# Altium PCB FOTA.PcbDoc
Units mm, origin at the board's own origin, x right, y up, seen from the top; angles counter-clockwise.
Board outline 102.11 x 62.23 mm, 2 copper layers (Top Layer, Bottom Layer); 27 components, 22 nets, 124 pads, 0 vias.
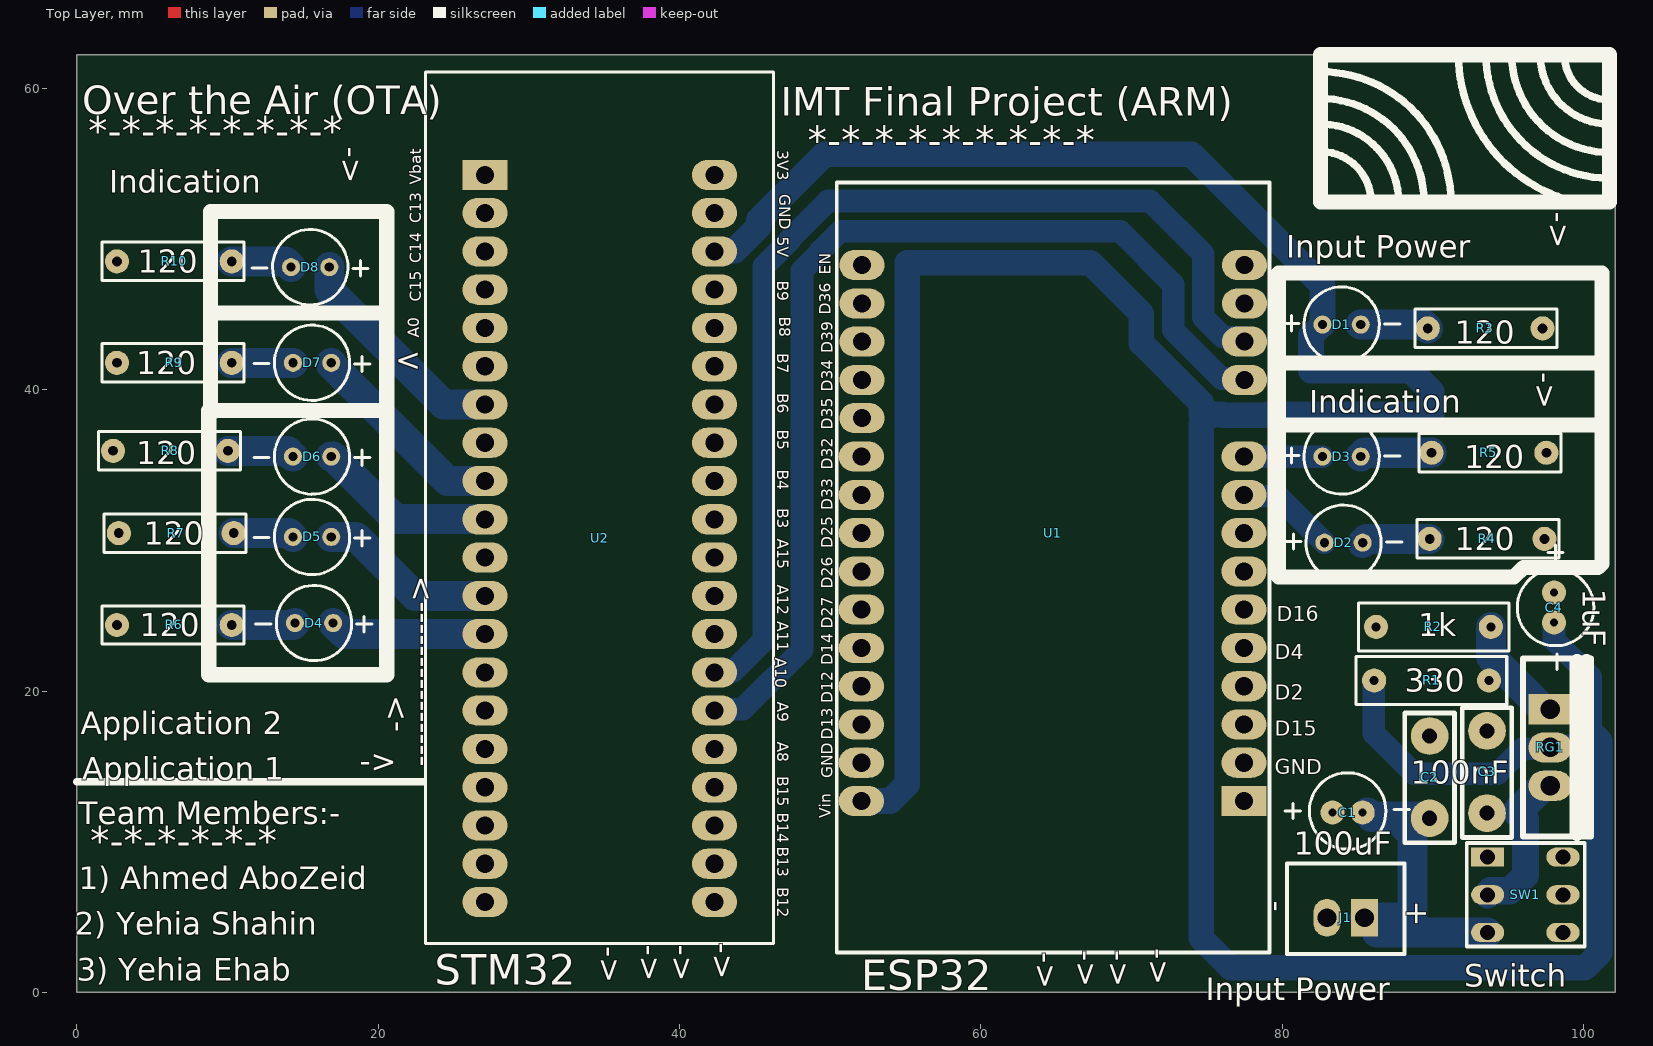
[diagram p0: Top Layer view]
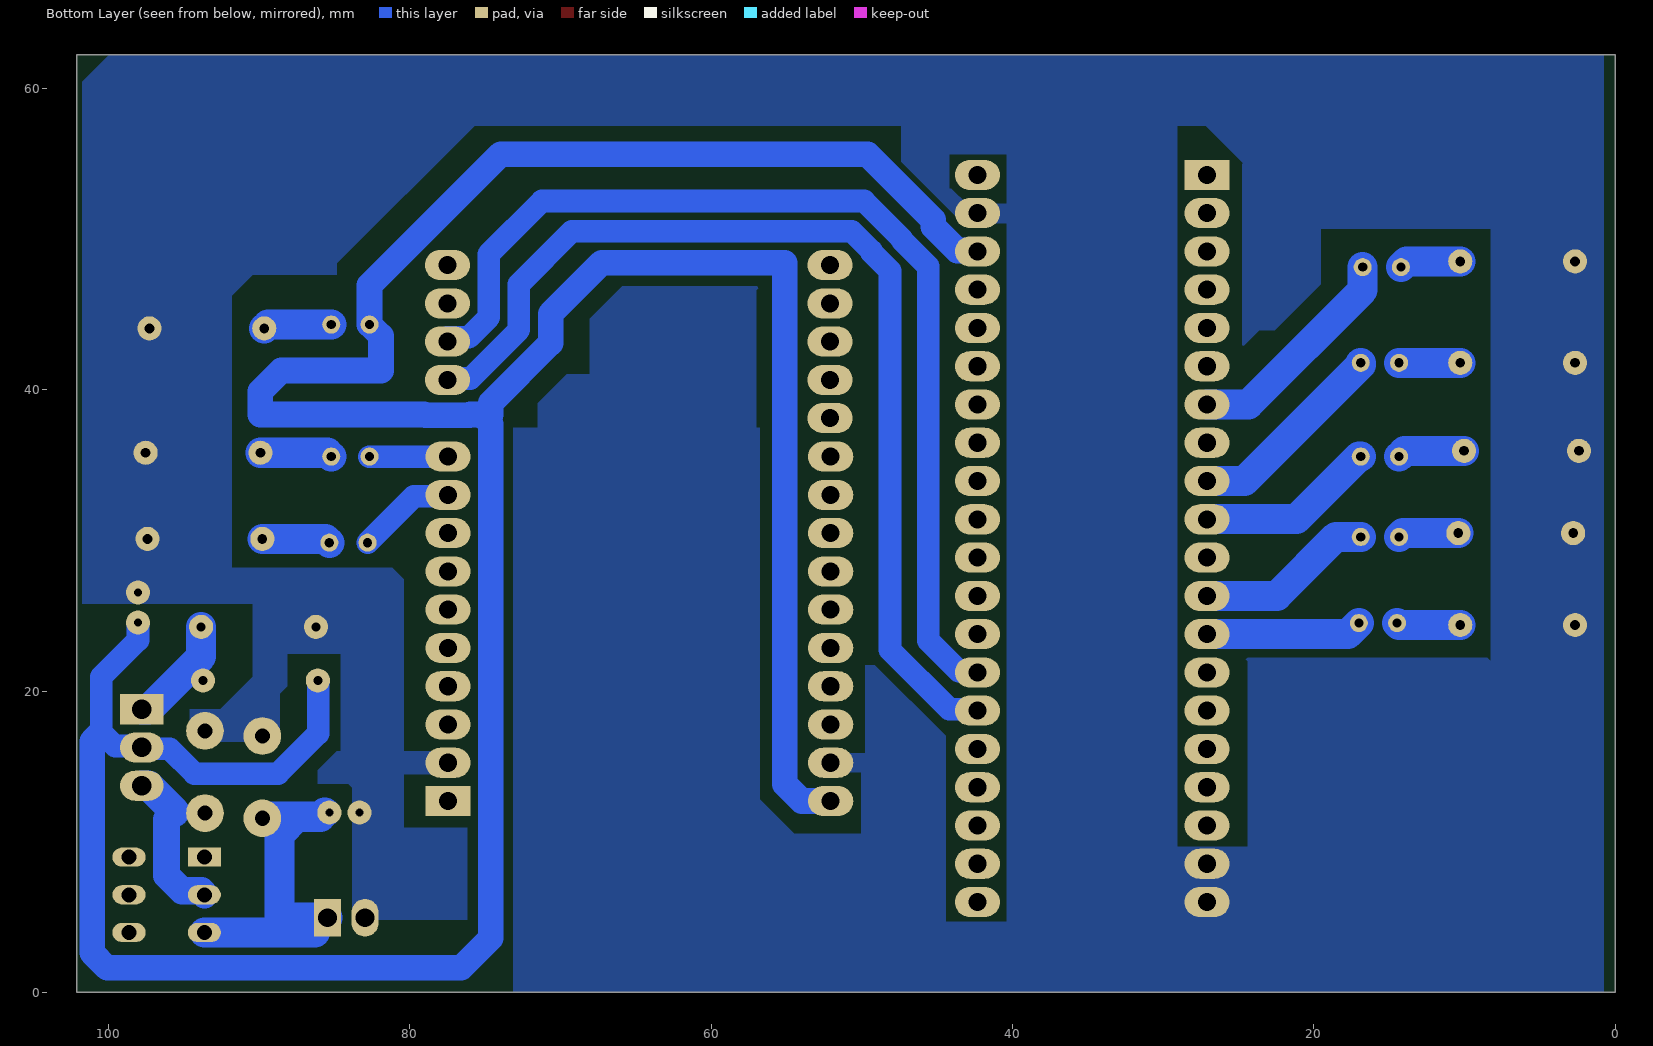
[diagram p1: Bottom Layer view, seen from below]

## Layer stack, top to bottom
Top Solder: solder mask 0.0102, Solder Resist, Dk 3.5
Top Layer: signal copper 0.0356
Dielectric 1: dielectric 0.32, FR-4, Dk 4.8
Bottom Layer: signal copper 0.0356
Bottom Solder: solder mask 0.0102, Solder Resist, Dk 3.5

## Board outline
0,0 102.108,0 102.108,62.23 0,62.23

## Design rules (kind name [scope] priority, off if disabled: settings)
Clearance [All] p1: gap=0.254 ignorepadtopadclearanceinfootprint=FALSE except(0: Arc-Hole Track-Hole SMDPad-Hole THPad-Hole Via-Hole Fill-Hole Poly-Hole Region-Hole Text-Hole; 0.5: Arc-Arc Arc-Track Arc-THPad Track-Track Track-THPad)
PolygonConnect PolygonConnect_9 [All vs IsNamedPolygon('Bottom Layer-GND 3')] p1: thpad.connectstyle=Direct thpad.reliefconductorwidth=0.254 thpad.reliefentries=4 thpad.polygonreliefangle="90 Angle" thpad.airgapwidth=0.254 smdpad.connectstyle=Relief smdpad.reliefconductorwidth=0.254 smdpad.reliefentries=4 smdpad.polygonreliefangle="90 Angle" smdpad.airgapwidth=0.254 via.connectstyle=Relief via.reliefconductorwidth=0.254 via.reliefentries=4 via.polygonreliefangle="90 Angle" via.airgapwidth=0.254
PolygonConnect PolygonConnect_8 [All vs IsNamedPolygon('Bottom Layer-GND 2')] p2: thpad.connectstyle=Direct thpad.reliefconductorwidth=0.254 thpad.reliefentries=4 thpad.polygonreliefangle="90 Angle" thpad.airgapwidth=0.254 smdpad.connectstyle=Relief smdpad.reliefconductorwidth=0.254 smdpad.reliefentries=4 smdpad.polygonreliefangle="90 Angle" smdpad.airgapwidth=0.254 via.connectstyle=Relief via.reliefconductorwidth=0.254 via.reliefentries=4 via.polygonreliefangle="90 Angle" via.airgapwidth=0.254
PolygonConnect PolygonConnect_7 [All vs IsNamedPolygon('Bottom Layer-GND 2')] p3: thpad.connectstyle=Direct thpad.reliefconductorwidth=0.254 thpad.reliefentries=4 thpad.polygonreliefangle="90 Angle" thpad.airgapwidth=0.254 smdpad.connectstyle=Relief smdpad.reliefconductorwidth=0.254 smdpad.reliefentries=4 smdpad.polygonreliefangle="90 Angle" smdpad.airgapwidth=0.254 via.connectstyle=Relief via.reliefconductorwidth=0.254 via.reliefentries=4 via.polygonreliefangle="90 Angle" via.airgapwidth=0.254
PolygonConnect PolygonConnect_6 [All vs IsNamedPolygon('Bottom Layer-GND 1')] p4: thpad.connectstyle=Direct thpad.reliefconductorwidth=0.254 thpad.reliefentries=4 thpad.polygonreliefangle="90 Angle" thpad.airgapwidth=0.254 smdpad.connectstyle=Relief smdpad.reliefconductorwidth=0.254 smdpad.reliefentries=4 smdpad.polygonreliefangle="90 Angle" smdpad.airgapwidth=0.254 via.connectstyle=Relief via.reliefconductorwidth=0.254 via.reliefentries=4 via.polygonreliefangle="90 Angle" via.airgapwidth=0.254
PolygonConnect PolygonConnect_5 [All vs IsNamedPolygon('Bottom Layer-GND 1')] p5: thpad.connectstyle=Direct thpad.reliefconductorwidth=0.254 thpad.reliefentries=4 thpad.polygonreliefangle="90 Angle" thpad.airgapwidth=0.254 smdpad.connectstyle=Relief smdpad.reliefconductorwidth=0.254 smdpad.reliefentries=4 smdpad.polygonreliefangle="90 Angle" smdpad.airgapwidth=0.254 via.connectstyle=Relief via.reliefconductorwidth=0.254 via.reliefentries=4 via.polygonreliefangle="90 Angle" via.airgapwidth=0.254
PolygonConnect PolygonConnect_4 [All vs IsNamedPolygon('Bottom Layer-GND 1')] p6: thpad.connectstyle=Direct thpad.reliefconductorwidth=0.254 thpad.reliefentries=4 thpad.polygonreliefangle="90 Angle" thpad.airgapwidth=0.254 smdpad.connectstyle=Relief smdpad.reliefconductorwidth=0.254 smdpad.reliefentries=4 smdpad.polygonreliefangle="90 Angle" smdpad.airgapwidth=0.254 via.connectstyle=Relief via.reliefconductorwidth=0.254 via.reliefentries=4 via.polygonreliefangle="90 Angle" via.airgapwidth=0.254
PolygonConnect PolygonConnect_3 [All vs IsNamedPolygon('Bottom Layer-GND 1')] p7: thpad.connectstyle=Direct thpad.reliefconductorwidth=0.254 thpad.reliefentries=4 thpad.polygonreliefangle="90 Angle" thpad.airgapwidth=0.254 smdpad.connectstyle=Relief smdpad.reliefconductorwidth=0.254 smdpad.reliefentries=4 smdpad.polygonreliefangle="90 Angle" smdpad.airgapwidth=0.254 via.connectstyle=Relief via.reliefconductorwidth=0.254 via.reliefentries=4 via.polygonreliefangle="90 Angle" via.airgapwidth=0.254
PolygonConnect PolygonConnect_2 [All vs IsNamedPolygon('Bottom Layer-GND')] p8: thpad.connectstyle=Direct thpad.reliefconductorwidth=0.254 thpad.reliefentries=4 thpad.polygonreliefangle="90 Angle" thpad.airgapwidth=0.254 smdpad.connectstyle=Relief smdpad.reliefconductorwidth=0.254 smdpad.reliefentries=4 smdpad.polygonreliefangle="90 Angle" smdpad.airgapwidth=0.254 via.connectstyle=Relief via.reliefconductorwidth=0.254 via.reliefentries=4 via.polygonreliefangle="90 Angle" via.airgapwidth=0.254
PolygonConnect PolygonConnect_1 [All vs IsNamedPolygon('Bottom Layer-GND')] p9: thpad.connectstyle=Direct thpad.reliefconductorwidth=0.254 thpad.reliefentries=4 thpad.polygonreliefangle="90 Angle" thpad.airgapwidth=0.254 smdpad.connectstyle=Relief smdpad.reliefconductorwidth=0.254 smdpad.reliefentries=4 smdpad.polygonreliefangle="90 Angle" smdpad.airgapwidth=0.254 via.connectstyle=Relief via.reliefconductorwidth=0.254 via.reliefentries=4 via.polygonreliefangle="90 Angle" via.airgapwidth=0.254
PolygonConnect [All] p10: connectstyle=Relief reliefconductorwidth=0.254 reliefentries=4 polygonreliefangle="90 Angle" airgapwidth=0.254
RoutingVias [All] p1: holewidth=0.711 width=1.27 viastyle="Through Hole" minholewidth=0.711 minwidth=1.27 maxholewidth=0.711 maxwidth=1.27
SolderMaskExpansion [All] p1: expansion=0.102
Width [All] p1: maxlimit=3 minlimit=0.5 preferedwidth=1 minimp=50.000000 maximp=50.000000 favimp=50.000000
30 further rules are at their usual default settings.

## Components (designator, comment, footprint, x,y, rotation, side; value= is the part's Value field where it differs from the comment)
C1 "100uF" CapacitorPOL 84.644,13.438 r180 top
C2 "100nF" "CAP non" 89.789,14.138 r90 top
C3 "100nF" "CAP non" 93.599,14.478 r90 top
C4 "1uF" CapacitorPOL 99.544,25.243 r90 top
D1 "LED" LED 82.677,44.323 r0 top
D2 "LED" LED 82.804,29.845 r0 top
D3 "LED" LED 82.677,35.56 r0 top
D4 "LED" LED 17.018,24.511 r180 top
D5 "LED" LED 16.891,30.226 r180 top
D6 "LED" LED 16.891,35.56 r180 top
D7 "LED" LED 16.891,41.783 r180 top
D8 "LED" LED 16.764,48.133 r180 top
J1 "Data Connector" "Data Connnector 2 pins" 79.221,4.953 r270 top
R1 "330" 330 83.006,19.701 r0 top
R2 "1k" R-1k 93.853,24.257 r180 top
R3 "120" R120 97.282,44.069 r180 top
R4 "120" R120 97.409,30.099 r180 top
R5 "120" R120 97.536,35.814 r180 top
R6 "120" R120 2.667,24.384 r0 top
R7 "120" R120 2.794,30.48 r0 top
R8 "120" R120 2.413,35.941 r0 top
R9 "120" R120 2.667,41.783 r0 top
R10 "120" R120 2.667,48.514 r0 top
RG1 "Adjustable Voltage Regulator" Regulator 97.79,18.796 r0 top
SW1 "On-Off Push Button" "DIP6 - SW" 96.139,6.477 r0 top
U1 "ESP32" ESP32 77.47,12.7 r180 top
U2 "STM32" DIP46 27.091,54.257 r0 top

## Footprints (in the part's own frame and the unit in brackets; to place one, negate y for a bottom-side part, rotate by r counter-clockwise, add the part's x,y. Pads: shape width x height; smd on the part's side, far side on the other; paste and mask are expansions set on the pad)
330 [mm]
  round 1.6 hole 0.6: 1(3.1,1) 2(10.72,1)
  silkscreen extent 1.9,-0.6 11.9,2.6, body extent 2.83,-0.14 11,2.14, height 2.44
"CAP non" [mm]
  round 2.5 hole 1: 1(-2.581,0) 2(2.88,0)
  silkscreen extent -4.2,-1.65 4.4,1.65, body extent -2.79,-1.3 3.21,1.3, height 5.2
CapacitorPOL [mm]
  round 1.6 hole 0.533: 1(-0.7,1.5) 2(1.3,1.5)
  silkscreen extent -3.8,-1.14 4.45,3.94, body extent -2.45,-1.25 3.05,4.25, height 12.5
"Data Connnector 2 pins" [mm]
  rect 2.5x1.8 hole 1.25: 1(0,6.25)
  oval 2.5x1.8 hole 1.25: 2(0,3.75)
  silkscreen extent -3.6,1.1 2.4,8.9, body extent -3.48,1.3 2.28,8.7, height 7.01
"DIP6 - SW" [mm]
  rect 2.2x1.27 hole 1: 1(-2.5,2.5)
  oval 2.2x1.27 hole 1: 2(-2.5,0) 3(-2.5,-2.5) 4(2.5,-2.5) 5(2.5,0) 6(2.5,2.5)
  silkscreen extent -3.89,-3.43 3.94,3.43, body extent -3.05,-2.84 2.95,3.16, height 10.2
DIP46 [mm]
  rect 3x2 hole 1.2: 1(0,0)
  oval 3x2 hole 1.2: 2(0,-2.54) 3(0,-5.08) 4(0,-7.62) 5(0,-10.16) 6(0,-12.7) 7(0,-15.24) 8(0,-17.78) 9(0,-20.32) 10(0,-22.86) 11(0,-25.4) 12(0,-27.94) 13(0,-30.48) 14(0,-33.02) 15(0,-35.56) 16(0,-38.1) 17(0,-40.64) 18(0,-43.18) 19(0,-45.72) 20(0,-48.26) 27(15.24,-48.26) 28(15.24,-45.72) 29(15.24,-43.18) 30(15.24,-40.64) 31(15.24,-38.1) 32(15.24,-35.56) 33(15.24,-33.02) 34(15.24,-30.48) 35(15.24,-27.94) 36(15.24,-25.4) 37(15.24,-22.86) 38(15.24,-20.32) 39(15.24,-17.78) 40(15.24,-15.24) 41(15.24,-12.7) 42(15.24,-10.16) 43(15.24,-7.62) 44(15.24,-5.08) 45(15.24,-2.54) 46(15.24,0)
  silkscreen extent -3.96,-51.02 19.15,6.84, body extent -3.92,-51 19.08,6.8, height 11.51
ESP32 [mm]
  rect 3x2 hole 1.2: 1(0,0)
  oval 3x2 hole 1.2: 2(0,-2.54) 3(0,-5.08) 4(0,-7.62) 5(0,-10.16) 6(0,-12.7) 7(0,-15.24) 8(0,-17.78) 9(0,-20.32) 10(0,-22.86) 12(-0.04,-27.95) 13(-0.04,-30.49) 14(-0.04,-33.03) 15(-0.04,-35.57) 16(25.36,-35.57) 17(25.36,-33.03) 18(25.36,-30.49) 19(25.36,-27.95) 20(25.36,-25.41) 21(25.4,-22.86) 22(25.4,-20.32) 23(25.4,-17.78) 24(25.4,-15.24) 25(25.4,-12.7) 26(25.4,-10.16) 27(25.4,-7.62) 28(25.4,-5.08) 29(25.4,-2.54) 30(25.4,0)
  silkscreen extent -1.7,-41.05 27.03,10.06, body extent -1.58,-40.97 26.92,9.96, height 15.2
LED [mm]
  round 1.2 hole 0.61: 1(0,0) 2(2.54,0)
  silkscreen extent -2.58,-2.5 5.14,2.5, body extent -0.65,-1.9 2.78,1.9, height 5.21
R120 [mm]
  round 1.6 hole 0.65: 1(0,0) 2(7.62,0)
  silkscreen extent -0.97,-1.28 8.45,1.28, body extent -0.27,-1.14 7.89,1.14, height 2.44
R-1k [mm]
  round 1.6 hole 0.6: 1(0,0) 2(7.62,0)
  silkscreen extent -1.2,-1.6 8.8,1.6, body extent -0.18,-1.19 7.98,1.1, height 2.44
Regulator [mm]
  rect 2.9x2 hole 1.3: 1(0,0)
  oval 2.9x2 hole 1.3: 2(0,-2.54) 3(0,-5.08)
  silkscreen extent -1.8,-8.44 2.7,3.36, body extent -1.75,-8.48 2.65,3.4, height 20.11

## Part data
C1: library part "CAP 100u", "Cap Aluminum 100uF 25V 20% (10 X 12mm) Radial Aluminum Cylindrical Can 5mm 250mA 1000 hr 150°C Bulk", Case/Package=Radial, Manufacturer 1="Vishay BCcomponents", Manufacturer Part Number 1=MAL216056101E3, Max Operating Temperature=150°C, Min Operating Temperature=-55°C, Package Quantity=1000, Ripple Current=175mA, Supplier Part Number 1=4837PHBK-ND, Tolerance=20%, Voltage Rating=25V, Capacitance=100uF, Category=Capacitors, ComponentLink1Description=http://www.farnell.com/datasheets/2057608.pdf?src-supplier=Element14, ComponentLink1URL=http://www.farnell.com/datasheets/2057608.pdf?src-supplier=Element14, ComponentLink2Description=http://www.vishay.com/docs/49448/_alu_caps_smd_radial_axial_vmn-sg2185-1512.pdf?src-supplier=Digi-Key, ComponentLink2URL=http://www.vishay.com/docs/49448/_alu_caps_smd_radial_axial_vmn-sg2185-1512.pdf?src-supplier=Digi-Key, Diameter=10mm, Height=12mm, Height - Seated (Max)=0.531inch, Impedance=120mR, Lead Pitch=0.197inch, Life (Hours)=1000Hour, Mount="Through Hole", Packaging=Bulk, Polarity=Polar, Pricing 1="1=1.67000, 10=1.31800, 50=1.14220, 100=0.98840, 500=0.74680, 1000=0.65895, 2500=0.61502, 5000=0.59306 (USD)", REACH SVHC=Unknown, RoHS=Yes, RoHS Compliant=Yes, Stock 1=2988, Supplier 1=Digi-Key, Voltage Rating (DC)=25V
C2 C3: library part "Non polarized capacitor", "Generial Non polarized capacitor for through hole or SMD capacitors"
C4: library part "CAP 10u", "10uF 35 V dc Aluminium Electrolytic Capacitor; BX Series 1000h 10(Dia.)x12.5mm", Capacitance=10uF, Case/Package=Radial, Leakage Current=4uA, Manufacturer 1=Nichicon, Manufacturer Part Number 1=UBX1V100MPL, Max Operating Temperature=150°C, Min Operating Temperature=-55°C, Package Quantity=200, Ripple Current=175mA, Supplier Part Number 1=493-14906-ND, Tolerance=20%, Voltage=35V, Category=Capacitor, ComponentLink1Description=https://datasheet.ciiva.com/11778/0900766b80ec9534-11778134.pdf?src-supplier=RSComponents, ComponentLink1URL=https://datasheet.ciiva.com/11778/0900766b80ec9534-11778134.pdf?src-supplier=RSComponents, ComponentLink2Description=https://datasheet.ciiva.com/41750/444350-da-01-en-radial-elko-bx-10uf-35-v-41750976.pdf?src-supplier=Conrad, ComponentLink2URL=https://datasheet.ciiva.com/41750/444350-da-01-en-radial-elko-bx-10uf-35-v-41750976.pdf?src-supplier=Conrad, ComponentLink3Description=https://datasheet.ciiva.com/115/e-bx-115042.pdf?src-supplier=Digi-Key, ComponentLink3URL=https://datasheet.ciiva.com/115/e-bx-115042.pdf?src-supplier=Digi-Key, Construction=RADIAL, Diameter=10mm, Dissipation Factor=0.12%, Height=12.5mm, Height - Seated (Max)=0.551inch, Lead Diameter=0.6mm, Lead Pitch=5mm, Length=12.5mm, Life (Hours)=1000Hour, Mount="Through Hole", Packaging=Bulk, Pricing 1="1=1.40000, 10=1.10300, 50=0.95620, 100=0.82750, 500=0.62520, 1000=0.55166, 2500=0.51488, 5000=0.49649 (USD)", Radiation Hardening=No, RoHS=Yes, RoHS Compliant=Yes, Series=UBX, Stock 1=5, Supplier 1=Digi-Key, Termination=Radial, Voltage Rating=35V, Voltage Rating (DC)=35V
D1 D2 D3 D4 D5 D6 D7 D8: "Led, Red, T-1 (3Mm), 630 Nm, 1.8 V, 30 Ma, 20 Mcd Rohs Compliant: Yes", Case/Package=Radial, Color=Red, Forward Current=30mA, Forward Voltage=2.2V, Manufacturer 1="Wurth Electronics", Manufacturer Part Number 1=151031SS06000, Max Operating Temperature=85°C, Min Operating Temperature=-40°C, Package Quantity=1, Supplier Part Number 1=732-5006-ND, Test Current=20mA, Category=Optoelectronics, ComponentLink1Description=https://datasheet.ciiva.com/22657/151031ss06000-22657010.pdf?src-supplier=Element14, ComponentLink1URL=https://datasheet.ciiva.com/22657/151031ss06000-22657010.pdf?src-supplier=Element14, ComponentLink2Description=https://datasheet.ciiva.com/29335/759483-da-01-en-tht-led-3mm-superrot-151031ss06000-29335440.pdf?src-supplier=Conrad, ComponentLink2URL=https://datasheet.ciiva.com/29335/759483-da-01-en-tht-led-3mm-superrot-151031ss06000-29335440.pdf?src-supplier=Conrad, ComponentLink3Description=https://datasheet.ciiva.com/29562/151031ss06000-29562907.pdf?src-supplier=Digi-Key, ComponentLink3URL=https://datasheet.ciiva.com/29562/151031ss06000-29562907.pdf?src-supplier=Digi-Key, Dominant Wavelength=640nm, Height=5.55mm, Lens Size=3mm, Lens Style=Diffused,Circular,Round, Luminous Intensity=35mcd, Mount="Through Hole", Packaging=Bulk, Pricing 1="1=0.18000, 50=0.16700, 100=0.14300, 500=0.12300 (USD)", REACH SVHC=Unknown, RoHS=Yes, RoHS Compliant=Yes, Stock 1=4849, Supplier 1=Digi-Key, Viewing Angle=60°, Wavelength=630nm
J1: library part "Data Connector 2 pins"
R1: library part R330, "General Type Carbon Film Resistor 330Ohm 1/4W 5% Axial Bulk", Case/Package=Axial, Manufacturer 1=Yageo, Manufacturer Part Number 1=CFR-25JB-52-330R, Max Operating Temperature=155°C, Max Power Dissipation=250mW, Min Operating Temperature=-55°C, Package Quantity=200, Resistance=330R, Resistor Type="Carbon Film", Supplier Part Number 1=330QBK-ND, Temperature Coefficient=500ppm/°C, Tolerance=5%, Category=Resistors, ComponentLink1Description=http://www.yageo.com/NewPortal/yageodocoutput?fileName=/pdf/throughhole/Yageo_LR_CFR_2013.pdf&src-supplier=Digi-Key, ComponentLink1URL=http://www.yageo.com/NewPortal/yageodocoutput?fileName=/pdf/throughhole/Yageo_LR_CFR_2013.pdf&src-supplier=Digi-Key, Length=0.248inch, Number of Terminations=2, Packaging=Bulk, Pricing 1="1=0.10000, 10=0.06800, 25=0.04680, 50=0.03640, 100=0.02600, 250=0.02028, 500=0.01612, 1000=0.01144, 5000=0.00884 (USD)", RoHS=Yes, RoHS Compliant=Yes, Series="Carbon Film", Stock 1=34290, Supplier 1=Digi-Key
R2: library part "R 1k", "Res Carbon Film 1K Ohm 5% 1/4W -400ppm/°C to 0ppm/°C Conformal AXL Thru-Hole T/R", Case/Package=Conformal, Manufacturer 1="Stackpole Electronics", Manufacturer Part Number 1=CF14JT1K00, Max Operating Temperature=155°C, Max Power Dissipation=250mW, Min Operating Temperature=-55°C, Package Quantity=1, Resistance=1kR, Resistor Type="Carbon Film", Temperature Coefficient=-400ppm/°C, Tolerance=5%, Category=Resistors, ComponentLink1Description=http://components.arrow.com/part/dataview/27620077S9848643N1174?src-supplier=Arrow+Electronics, ComponentLink1URL=http://components.arrow.com/part/dataview/27620077S9848643N1174?src-supplier=Arrow+Electronics, ComponentLink2Description=http://www.seielect.com/Catalog/SEI-CF_CFM.pdf?src-supplier=Future+Electronics, ComponentLink2URL=http://www.seielect.com/Catalog/SEI-CF_CFM.pdf?src-supplier=Future+Electronics, ComponentLink3Description=https://www.seielect.com/catalog/SEI-CF_CFM.pdf?src-supplier=Avnet, ComponentLink3URL=https://www.seielect.com/catalog/SEI-CF_CFM.pdf?src-supplier=Avnet, ComponentLink4Description=https://www.seielect.com/catalog/SEI-Packaging.pdf?src-supplier=Digi-Key, ComponentLink4URL=https://www.seielect.com/catalog/SEI-Packaging.pdf?src-supplier=Digi-Key, ComponentLink5Description=https://www.seielect.com/Catalog/SEI-CF_CFM.pdf?src-supplier=Digi-Key, ComponentLink5URL=https://www.seielect.com/Catalog/SEI-CF_CFM.pdf?src-supplier=Digi-Key, ComponentLink6Description=https://www.verical.com/server-webapp/html/getDatasheet?partID=360403&src-supplier=Verical, ComponentLink6URL=https://www.verical.com/server-webapp/html/getDatasheet?partID=360403&src-supplier=Verical, Construction=Cylindrical, Contact Plating=Tin,Matte, Diameter=2.3mm, Features="Flame Retardant Coating", Lead Free="Lead Free", Length=6.5mm, Military Standard=Not, Mount="Through Hole,Axial", Number of Terminations=2, Packaging="Tape and Reel", Power Rating=250mW, Pricing 1="5000=0.00710, 10000=0.00690, 20000=0.00610 (USD)", Radiation Hardening=No, RoHS=Yes, RoHS Compliant=Yes, Series=CF, Stock 1=285000, Supplier 1="Arrow Electronics", Supplier Part Number 1=CF14JT1K00, Termination=Axial
R3 R4 R5 R6 R7 R8 R9 R10: library part R120, "General Type Carbon Film Resistor 120Ohm 1/4W 5% Axial Bulk", Case/Package=Axial, Manufacturer 1=Yageo, Manufacturer Part Number 1=CFR-25JB-52-120R, Max Operating Temperature=155°C, Max Power Dissipation=250mW, Min Operating Temperature=-55°C, Package Quantity=200, Resistance=120R, Resistor Type="Carbon Film", Supplier Part Number 1=9005903, Temperature Coefficient=500ppm/°C, Tolerance=5%, ComponentLink1Description=http://www.yageo.com/documents/recent/General%20Type_CFR.pdf?src-supplier=Future+Electronics, ComponentLink1URL=http://www.yageo.com/documents/recent/General%20Type_CFR.pdf?src-supplier=Future+Electronics, ComponentLink2Description=http://www.yageo.com/NewPortal/yageodocoutput?fileName=/pdf/throughhole/Yageo_LR_CFR_2013.pdf&src-supplier=Digi-Key, ComponentLink2URL=http://www.yageo.com/NewPortal/yageodocoutput?fileName=/pdf/throughhole/Yageo_LR_CFR_2013.pdf&src-supplier=Digi-Key, Lead Free="Lead Free", Length=0.248inch, Number of Terminations=2, Packaging=Bulk, Power Rating=250mW, Pricing 1="10000=0.00860, 30000=0.00580, 50000=0.00570, 100000=0.00550, 200000=0.00540 (USD)", RoHS=Yes, RoHS Compliant=Yes, Series="Carbon Film", Stock 1=7000, Supplier 1="Future Electronics"
RG1: library part LM350
U2: library part stm32f103c8t6, "STM32 Nucleo-32 development board with STM32F031K6 MCU, supports Arduino connectivity", Manufacturer 1=STMicroelectronics, Manufacturer Part Number 1=NUCLEO-F031K6, Package Quantity=1, Category="Development Boards, Kits, Programmers", ComponentLink1Description=http://www.farnell.com/datasheets/1966773.pdf?src-supplier=Farnell, ComponentLink1URL=http://www.farnell.com/datasheets/1966773.pdf?src-supplier=Farnell, ComponentLink2Description=http://www.farnell.com/datasheets/1966773.pdf?src-supplier=Element14, ComponentLink2URL=http://www.farnell.com/datasheets/1966773.pdf?src-supplier=Element14, ComponentLink3Description=http://www.st.com/st-web-ui/static/active/en/resource/technical/document/user_manual/DM00119724.pdf?s_searchtype=keyword&src-supplier=Avnet, ComponentLink3URL=http://www.st.com/st-web-ui/static/active/en/resource/technical/document/user_manual/DM00119724.pdf?s_searchtype=keyword&src-supplier=Avnet, ComponentLink4Description=http://www.st.com/content/ccc/resource/technical/document/datasheet/4d/c2/7e/10/77/4f/4a/60/DM00104043.pdf/files/DM00104043.pdf/jcr:content/translations/en.DM00104043.pdf?src-supplier=Digi-Key, ComponentLink4URL=http://www.st.com/content/ccc/resource/technical/document/datasheet/4d/c2/7e/10/77/4f/4a/60/DM00104043.pdf/files/DM00104043.pdf/jcr:content/translations/en.DM00104043.pdf?src-supplier=Digi-Key, Core Architecture=ARM, Evaluation Kit=Yes, Lead Free="Lead Free", Number of Bits=32, Pricing 1="61=15.28100, 70=14.45500, 130=13.62900, 310=12.80300, 610=11.97700, 3100=11.15100, 6100=10.32500 (USD)", REACH SVHC="No SVHC", RoHS=Yes, Stock 1=0, Supplier 1=Avnet, Supplier Part Number 1=NUCLEO-F031K6

## Nets (pads, with @x,y where several pads share a name; then routed paths per layer and width w, separated by ;. In a path a pad name is that pad's centre, name@x,y a point inside that pad or via, vN(x,y) a via of type N, cw(c..) or ccw(c..) an arc to the next point about the centre after c; other vN are vias at no path point)
5V: C4.1 D1.1 R1.1 RG1.2 U1.30 U2.44 | length 247
  Bottom Layer w1.5: R1.1 86.087,20.682 86.087,17.185 88.753,14.518 94.295,14.518 95.937,16.16 97.694,16.16 RG1.2 97.886,16.352 99.563,16.352 100.49,17.278 100.49,20.932 98.044,23.378 C4.1@98.044,24.493
  Bottom Layer w1.7: U2.44@42.291,49.13 U2.44@42.341,49.18 ; U2.44 42.388,49.234 43.672,49.234 45.26,50.823 45.26,51.265 49.621,55.626 73.977,55.626 82.677,46.926 D1.1 81.915,43.561 81.915,41.275 88.539,41.275 89.916,39.898 89.916,38.354 79.037,38.354 78.983,38.3 76.037,38.3 75.983,38.354 75.255,38.354 74.62,37.719 74.62,3.612 76.605,1.627 100.093,1.627 101.089,2.623 101.089,16.679 100.561,17.208 ; U1.30 53.995,12.7 55.118,13.823 55.118,48.424 67.273,48.424 70.66,45.037 70.66,43.1 74.62,39.14 74.62,38.354
GND: C1.2 C2.2 C3.2 C4.2 J1.2 R2.2 R3.1 R4.1 R5.1 R6.1 R7.1 R8.1 R9.1 R10.1 U1.2 U1.29 U2.19 U2.20 U2.45
Ind1: D2.1 U1.9 | length 6.6
  Bottom Layer w1.5: U1.9 77.566,32.924 79.725,32.924 D2.1
Ind2: D3.1 U1.10 | length 5.2
  Bottom Layer w1.5: U1.10 D3.1
Ind3: D8.1 U2.7 | length 15
  Bottom Layer w2: D8.1 16.764,46.609 24.356,39.017 U2.7
LED1: D4.1 U2.13 | length 10.4
  Bottom Layer w2: D4.1 17.752,23.777 U2.13
LED2: D5.1 U2.12 | length 11.8
  Bottom Layer w2: D5.1 18.542,30.226 22.451,26.317 U2.12
LED3: D6.1 U2.10 | length 11.7
  Bottom Layer w2: D6.1 17.018,35.56 21.148,31.43 U2.10@26.891,31.43
LED4: D7.1 U2.9 | length 13.5
  Bottom Layer w2: D7.1 16.891,41.656 24.61,33.937 U2.9
M_RX: U1.12 U2.32 | length 69
  Bottom Layer w1.5: U2.32 42.427,18.793 44.193,18.793 48.133,22.733 48.133,47.897 49.36,49.124 49.36,49.202 50.682,50.524 69.237,50.524 72.76,47.001 72.76,43.97 75.984,40.746 77.414,40.746 U1.12
M_TX: U1.13 U2.33 | length 69.2
  Bottom Layer w1.5: U2.33 42.427,21.333 43.569,21.333 45.593,23.357 45.593,48.186 47.36,49.953 47.36,50.03 49.854,52.524 71.231,52.524 74.76,48.995 74.76,44.798 76.078,43.48 77.51,43.48 U1.13
NetC1_1: C1.1 C2.1 J1.1 SW1.3 | length 22
  Bottom Layer w2: J1.1 88.646,4.953 88.646,10.51 87.503,11.653 ; C1.1@85.644,11.938 85.929,11.653 87.503,11.653 ; J1.1@86.297,3.977 SW1.3 ; C2.1 89.693,11.653 87.503,11.653
NetC3_1: C3.1 RG1.3 SW1.2 | length 10.4
  Bottom Layer w1.8: SW1.2 93.639,6.542 93.839,6.742 95.119,6.742 96.139,7.762 96.139,11.47 95.617,11.993
  Bottom Layer w2: 95.617,11.993 97.34,13.716 RG1.3
NetD1_2: D1.2 R3.2 | length 4.6
  Bottom Layer w2: D1.2 89.408,44.323 R3.2
NetD2_2: D2.2 R4.2 | length 4.6
  Bottom Layer w2: D2.2 85.598,30.099 R4.2
NetD3_2: D3.2 R5.2 | length 4.8
  Bottom Layer w2: D3.2 85.471,35.814 R5.2
NetD4_2: D4.2 R6.2 | length 4.2
  Bottom Layer w2: R6.2 14.351,24.384 D4.2
NetD5_2: D5.2 R7.2 | length 4
  Bottom Layer w2: R7.2 14.097,30.48 D5.2
NetD6_2: D6.2 R8.2 | length 4.5
  Bottom Layer w2: R8.2 13.97,35.941 D6.2
NetD7_2: D7.2 R9.2 | length 4.1
  Bottom Layer w2: R9.2 D7.2
NetD8_2: D8.2 R10.2 | length 4.1
  Bottom Layer w2: R10.2 13.843,48.514 D8.2
NetR1_2: R1.2 R2.1 RG1.1 | length 7.4
  Bottom Layer w2: R2.1 93.853,22.283 97.34,18.796 RG1.1
pads on no net: SW1.1 SW1.4 SW1.5 SW1.6 U1.1 U1.3 U1.4 U1.5 U1.6 U1.7 U1.8 U1.14 U1.15 U1.16 U1.17 U1.18 U1.19 U1.20 U1.21 U1.22 U1.23 U1.24 U1.25 U1.26 U1.27 U1.28 U2.1 U2.2 U2.3 U2.4 U2.5 U2.6 U2.8 U2.11 U2.14 U2.15 U2.16 U2.17 U2.18 U2.27 U2.28 U2.29 U2.30 U2.31 U2.34 U2.35 U2.36 U2.37 U2.38 U2.39 U2.40 U2.41 U2.42 U2.43 U2.46

## Polygon pours and split planes (outlines as drawn)
GND on Bottom Layer (solid, pour order 22): 80.391,4.826 76.2,4.826 76.2,10.922 80.645,10.922
GND on Bottom Layer (solid, pour order 20): 24.765,55.118 24.765,42.799 23.622,43.942 22.606,43.942 19.558,46.99 19.558,51.816
GND on Bottom Layer (solid, pour order 18): 57.023,36.83 57.023,46.609 56.769,46.863 65.913,46.863 68.072,44.704 68.072,41.021 69.596,41.021 71.501,39.116 71.501,36.068
GND on Bottom Layer (solid, pour order 16): 49.784,10.541 55.245,10.541 55.245,5.334 54.483,4.572 54.356,4.699 49.53,4.699
GND on Bottom Layer "Bottom Layer-GND 3" (solid, pour order 14): 80.518,14.478 76.708,14.478 76.581,14.605 76.581,16.002 81.153,16.002 81.28,15.875
GND on Bottom Layer "Bottom Layer-GND 2" (solid, pour order 12): 40.259,51.054 43.307,51.054 47.371,55.118 47.371,57.785 40.005,57.785 40.005,55.626 44.196,55.626 44.196,55.372 44.196,55.118 44.196,53.34 44.069,53.34 43.053,52.324 40.259,52.324
GND on Bottom Layer "Bottom Layer-GND" (solid, pour order 0): 0.762,0.004 0.762,62.23 99.949,62.23 101.727,60.452 101.727,25.781 90.424,25.781 90.424,20.955 92.583,18.796 94.615,18.796 94.615,17.272 93.98,16.637 88.9,16.637 88.646,16.891 88.646,19.812 88.138,20.32 88.138,22.479 84.582,22.479 84.582,16.002 84.836,16.002 86.106,14.732 86.106,13.843 84.074,13.843 83.82,13.589 83.82,4.826 80.391,4.826 80.391,27.432 81.153,28.194 91.821,28.194 91.821,46.228 90.424,47.625 84.836,47.625 84.836,48.387 75.692,57.531 27.178,57.531 20.32,50.673 8.255,50.673 8.255,21.971 8.509,22.225 24.384,22.225 24.511,22.098 24.384,21.971 24.384,11.049 24.384,4.699 48.641,4.699 56.769,12.827 56.769,37.465 69.977,37.465 73.152,37.465 73.152,2.921 73.152,0.004
GND on Bottom Layer "Bottom Layer-GND 1" (solid, pour order 6): 24.384,9.652 29.083,9.652 29.083,57.531 29.464,57.912 40.386,57.912 40.386,4.699 44.45,4.699 44.45,5.08 44.45,17.018 49.149,21.717 49.784,21.717 49.784,15.875 52.959,15.875 52.959,14.605 50.038,14.605 50.038,4.572 50.165,4.445 49.403,3.683 24.257,3.683

## Silkscreen, mask and mechanical layers (free items; w line width, h text height)
Top Overlay:
  lines w0.5: 0,13.97 22.987,13.97 ; 82.42,57.633 cw(c82.55,52.451) 87.732,52.577 ; 82.421,55.801 cw(c82.55,52.451) 85.9,52.585 ; 82.55,59.32 cw(c82.55,52.451) 89.417,52.578 ; 82.55,61.102 cw(c82.55,52.451) 91.201,52.451 ; 91.708,62.23 ccw(c101.727,62.23) 98.78,52.654 ; 93.531,62.23 ccw(c101.727,62.23) 101.599,54.035 ; 95.239,62.23 ccw(c101.727,62.23) 101.727,55.742 ; 97.123,62.23 ccw(c101.727,62.23) 101.603,57.628 ; 98.73,62.23 ccw(c101.727,62.23) 101.857,59.236
  lines w1: 8.89,38.354 8.89,51.816 20.574,51.816 20.574,38.354 ; 9.144,45.085 20.574,45.085 ; 79.756,37.655 100.774,37.655 ; 80.01,41.783 101.092,41.783 ; 99.568,10.541 99.568,21.971 ; 100.203,21.336 100.203,10.668 100.203,21.971 ; 8.763,21.082 20.574,21.082 20.574,38.608 8.763,38.608 8.763,21.082 ; 79.756,27.559 79.756,47.752 101.219,47.752 101.219,28.448 100.965,28.194 96.012,28.194 95.377,27.559 79.756,27.559 ; 82.55,52.451 101.727,52.451 101.727,62.23 82.55,62.23 82.55,52.451
  text "Over the Air (OTA)" at 0.381,58.293 h1.9
  text "IMT Final Project (ARM)" at 46.736,58.166 h1.9
  text "*-*-*-*-*-*-*-*" at 0.762,56.261 h1.9
  text "->" at 17.526,56.134 h1.5 r270
  text "3V3" at 46.482,55.88 h0.75 r270
  text "*-*-*-*-*-*-*-*-*" at 48.514,55.626 h1.9
  text "Vbat" at 22.86,53.594 h0.75 r90
  text "Indication" at 2.159,53.086 h1.5
  text "GND" at 46.609,52.959 h0.75 r270
  text "->" at 97.663,51.816 h1.5 r270
  text "C13" at 22.86,51.054 h0.75 r90
  text "5V" at 46.482,50.165 h0.75 r270
  text "Input Power" at 80.264,48.768 h1.5
  text "C14" at 22.86,48.387 h0.75 r90
  text "EN" at 50.038,47.625 h0.75 r90
  text "B9" at 46.482,47.244 h0.75 r270
  text "C15" at 22.86,45.847 h0.75 r90
  text "D36" at 50.038,44.958 h0.75 r90
  text "B8" at 46.609,44.831 h0.75 r270
  text "A0" at 22.733,43.434 h0.75 r90
  text ">" at 22.86,42.545 h1.5 r180
  text "B7" at 46.482,42.418 h0.75 r270
  text "D39" at 50.165,42.418 h0.75 r90
  text "->" at 96.774,41.148 h1.5 r270
  text "D34" at 50.165,39.878 h0.75 r90
  text "B6" at 46.482,39.751 h0.75 r270
  text "Indication" at 81.788,38.481 h1.5
  text "B5" at 46.482,37.338 h0.75 r270
  text "D35" at 50.165,37.338 h0.75 r90
  text "B4" at 46.482,34.671 h0.75 r270
  text "D32" at 50.165,34.671 h0.75 r90
  text "B3" at 46.482,32.131 h0.75 r270
  text "D33" at 50.165,32.004 h0.75 r90
  text "A15" at 46.482,30.099 h0.75 r270
  text "D25" at 50.165,29.464 h0.75 r90
  text "A12" at 46.482,27.051 h0.75 r270
  text "D26" at 50.165,26.797 h0.75 r90
  text "A11" at 46.482,24.638 h0.75 r270
  text "D16" at 79.629,24.638 h1
  text "D27" at 50.165,24.13 h0.75 r90
  text "A10" at 46.355,22.225 h0.75 r270
  text "D4" at 79.502,22.098 h1
  text "D14" at 50.165,21.717 h0.75 r90
  text "D2" at 79.502,19.431 h1
  text "A9" at 46.482,19.304 h0.75 r270
  text "D12" at 50.165,19.177 h0.75 r90
  text "->" at 21.844,17.272 h1.5 r90
  text "Application 2" at 0.254,17.145 h1.5
  text "D15" at 79.502,17.018 h1
  text "D13" at 50.165,16.764 h0.75 r90
  text "A8" at 46.482,16.637 h0.75 r270
  text "--------------->" at 23.495,14.986 h1.5 r90
  text "->" at 18.796,14.605 h1.5
  text "GND" at 79.502,14.478 h1
  text "B15" at 46.482,14.351 h0.75 r270
  text "GND" at 50.165,14.224 h0.75 r90
  text "Application 1" at 0.381,14.097 h1.5
  text "B14" at 46.482,11.938 h0.75 r270
  text "Vin" at 50.038,11.557 h0.75 r90
  text "Team Members:-" at 0.127,11.176 h1.5
  text "B13" at 46.482,9.652 h0.75 r270
  text "*-*-*-*-*-*" at 0.889,9.144 h1.9
  text "B12" at 46.482,6.985 h0.75 r270
  text "1) Ahmed AboZeid" at 0.127,6.858 h1.5
  text "-" at 78.994,6.096 h1.5 r270
  text "+" at 88.265,6.096 h1.5 r270
  text "2) Yehia Shahin" at -0.127,3.81 h1.5
  text "->" at 42.164,3.302 h1.5 r270
  text "->" at 37.338,3.175 h1.5 r270
  text "->" at 39.497,3.175 h1.5 r270
  text "->" at 34.671,3.048 h1.5 r270
  text "->" at 71.12,2.921 h1.5 r270
  text "->" at 66.294,2.794 h1.5 r270
  text "->" at 68.453,2.794 h1.5 r270
  text "->" at 63.627,2.667 h1.5 r270
  text "3) Yehia Ehab" at 0,0.762 h1.5
  text "Switch" at 92.075,0.381 h1.5
  text "Input Power" at 74.93,-0.508 h1.5